# EAGLE board arduino_miniuno (EAGLE 6.6.0)

Size 203.18 x 263.83 mm. Coordinates in mm from the lower left corner, seen from the top.
Outline: 43.18,163.83 203.18,163.83 203.18,263.83 43.18,263.83 43.18,163.83
Copper layers (1*16): Top 0.035mm / dielectric 1.5mm / Bottom 0.035mm
Design rules "default": minimum track width 10mil, minimum drill 24mil, track to track 8mil, track to pad 8mil, pad to pad 8mil, via to via 8mil, smd to smd 8mil, copper to edge 40mil, drill to drill 8mil, minimum pad ring 10mil, minimum via ring 8mil, stop-mask expansion 4mil, vias tented up to drill 0mil, thermal gap 10mil
Net classes: 0 default: width 0.254 mm, clearance 0.254 mm; 1 power: width 0.61 mm, drill 0.61 mm, clearance 0.254 mm; 2 gnd: width 0.305 mm, drill 0.559 mm, clearance 0.254 mm; 3 usbvcc: width 0.508 mm, drill 0.61 mm, clearance 0.254 mm

## Footprints (pad centres in the part's own frame; a part is rotated, then mirrored left to right if it is on the bottom)
C0603-ROUND = smd 0.898 x 1.1: 1 -0.889,0; 2 0.889,0
C0402 = smd 0.635 x 0.635: 1 -0.445,0; 2 0.445,0
SOT23 = smd 1.016 x 1.143: 1 -0.889,-1.016; 2 0.889,-1.016; 3 0,1.016
SMB = smd 2.4 x 2.4: A 2.2,0; C -2.2,0
L1812 = smd 1.9 x 3.4: 1 -1.95,0; 2 1.95,0
7P-2.54-65/35MIL = drill 0.889 pad 1.651 square: 1 0,7.62 | drill 0.889 pad 1.651: 2 0,5.08; 3 0,2.54; 4 0,0; 5 0,-2.54; 6 0,-5.08; 7 0,-7.62
CHIP-LED0805 = smd 1.2 x 1.2: A 0,-1.05; C 0,1.05
0805 = smd 1.2 x 1: 1 -1.1,0; 2 1.1,0
PANASONIC_D = smd 3 x 1.4: + 2.4,0; - -2.4,0
ARDUINO_UNO = drill 1.016 pad 1.88: 0 63.5,50.8; 1 60.96,50.8; 2 58.42,50.8; 3 55.88,50.8; 3.3V 35.56,2.54; 4 53.34,50.8; 5 50.8,50.8; 5V 38.1,2.54; 6 48.26,50.8; 7 45.72,50.8; 8 41.656,50.8; 9 39.116,50.8; 10 36.576,50.8; 11 34.036,50.8; 12 31.496,50.8; 13 28.956,50.8; A0 50.8,2.54; A1 53.34,2.54; A2 55.88,2.54; A3 58.42,2.54; A4 60.96,2.54; A5 63.5,2.54; AREF 23.876,50.8; GND 26.416,50.8; GND. 43.18,2.54; GND.. 40.64,2.54; I/OREF 30.48,2.54; N/C 27.94,2.54; RESET 33.02,2.54; SCL 18.796,50.8; SDA 21.336,50.8; VIN 45.72,2.54 | drill 1.016 pad 1.88 octagon: +5V 66.167,30.48; GND_ 66.167,25.4; MISO 63.627,30.48; MOSI 66.167,27.94; RESET. 63.627,25.4; SCK 63.627,27.94 | smd 1.016 x 0.508: <PWR>+V 3.861,8.814; <PWR>-V 3.861,6.274 | smd 1.27 x 0.635: <USB>+V 7.772,39.878; <USB>D+ 7.772,38.887; <USB>D- 7.772,37.871; <USB>GND 7.772,36.83 | hole 3.2: 66.04,7.62; 66.04,35.56; 15.24,50.8; 13.97,2.54
LED-0603 = smd 0.762 x 0.889: + -0.762,0; - 0.762,0
R0402 = smd 0.635 x 0.635: 1 -0.445,0; 2 0.445,0
CAY16 = smd 0.5 x 0.65: 1 -1.2,-0.675; 2 -0.4,-0.675; 3 0.4,-0.675; 4 1.2,-0.675; 5 1.2,0.675; 6 0.4,0.675; 7 -0.4,0.675; 8 -1.2,0.675
SOT-23 = smd 0.787 x 0.889: 1 0.025,-1.016; 2 -0.94,1.016; 3 0.991,1.016
SSOP20 = smd 0.4 x 1.5: 1 -2.925,-3.625; 2 -2.275,-3.625; 3 -1.625,-3.625; 4 -0.975,-3.625; 5 -0.325,-3.625; 6 0.325,-3.625; 7 0.975,-3.625; 8 1.625,-3.625; 9 2.275,-3.625; 10 2.925,-3.625; 11 2.925,3.625; 12 2.275,3.625; 13 1.625,3.625; 14 0.975,3.625; 15 0.325,3.625; 16 -0.325,3.625; 17 -0.975,3.625; 18 -1.625,3.625; 19 -2.275,3.625; 20 -2.925,3.625
SOT223 = smd 1.219 x 2.235: 1 -2.311,-3.099; 2 0,-3.099; 3 2.311,-3.099 | smd 3.6 x 2.2: 4 0,3.099
SOT23-DBV = smd 0.55 x 1.2: 1 -0.95,-1.3; 2 0,-1.3; 3 0.95,-1.3; 4 0.95,1.3; 5 -0.95,1.3
MSOP08 = smd 0.3 x 1.2: 1 -0.976,-2.113; 2 -0.326,-2.113; 3 0.324,-2.113; 4 0.974,-2.113; 5 0.974,2.112; 6 0.324,2.112; 7 -0.326,2.112; 8 -0.976,2.112
PRO-MINI-2 = drill 0.8 long: A0 6.35,2.54; A1 6.35,0; A2 6.35,-2.54; A3 6.35,-5.08; A4 2.54,1.27; A5 2.54,3.81; A6 2.54,-8.89; A7 2.54,-6.35; D2 -8.89,2.54; D3 -8.89,0; D4 -8.89,-2.54; D5 -8.89,-5.08; D6 -8.89,-7.62; D7 -8.89,-10.16; D8 -8.89,-12.7; D9 -8.89,-15.24; D10 6.35,-15.24; D11 6.35,-12.7; D12 6.35,-10.16; D13 6.35,-7.62; DTR 5.08,15.24; GND 6.35,10.16; GND1 -8.89,5.08; GND2 -7.62,15.24; GND3 -5.08,15.24; RAW 6.35,12.7; RST 6.35,7.62; RST1 -8.89,7.62; RX1 -8.89,10.16; RX1-1 0,15.24; TX0 -8.89,12.7; TX0-1 2.54,15.24; VCC 6.35,5.08; VCC1 -2.54,15.24
HC49UP = smd 5.334 x 1.93: 1 -4.826,0; 2 4.826,0
PN61729 = drill 0.95 pad 1.676 octagon: 1 1.25,4.71; 2 -1.25,4.71; 3 -1.25,2.71; 4 1.25,2.71 | drill 2.2: P$1 -6,0; P$2 6,0
POWERSUPPLY_DC-21MM = drill 1.3 pad 4 octagon: 1 -5.08,-3.353; 2 -0.076,-6.35; 3 -0.076,-0.356 | drill 1.3: 4 -5.08,-4.115; 5 -5.08,-2.591; 6 -0.838,-0.356; 7 0.686,-0.356; 8 -0.838,-6.35; 9 0.686,-6.35
CT/CN0603 = smd 1 x 1: 1 -1,0; 2 1,0

## Placement (x,y rotation side)
C1  100n  [C0603-ROUND]  -5.08,76.2 0 top  (outside the outline)
C2  100n  [C0603-ROUND]  12.7,114.3 0 top
C3  1u  [C0603-ROUND]  0,76.2 0 top
C5  100nF  [C0402]  29.21,215.9 0 top
C6  22pF  [C0402]  25.4,215.9 0 top
C7  10nF  [C0402]  21.59,215.9 0 top
C8  22pF  [C0402]  17.78,215.9 0 top
D1  CESD5V0AP  [SOT23]  13.97,212.09 0 top
D2  CESD5V0AP  [SOT23]  5.08,212.09 0 top
D3  M7  [SMB]  15.24,123.19 0 top
F1  MF-MSMF050-2 500mA  [L1812]  11.43,200.66 0 top
J3  1X7P-2.54-2.54-6.0-90D-1  [7P-2.54-65/35MIL]  27.94,173.99 0 top
L  YELLOW  [CHIP-LED0805]  5.08,102.87 0 top
L1  BLM21  [0805]  22.86,212.09 0 top
PC1  47u  [PANASONIC_D]  -2.54,113.03 0 top
PC2  47u  [PANASONIC_D]  6.35,113.03 0 top
PCB2  ARDUINO_UNO  [ARDUINO_UNO]  0,0 0 top
PWR  GREEN  [LED-0603]  1.27,207.01 0 top
Q1  S8550  [SOT23]  0,212.09 0 top
Q2  S8550  [SOT23]  -5.08,212.09 0 top  (outside the outline)
R1  1k  [R0402]  13.97,215.9 0 top
R2  1k  [R0402]  10.16,215.9 0 top
R3  1k  [R0402]  6.35,215.9 0 top
R4  1k  [R0402]  2.54,215.9 0 top
R5  1k  [R0402]  -1.27,215.9 0 top
RN1  10K  [CAY16]  6.35,83.82 0 top
RN2  1K  [CAY16]  11.43,83.82 0 top
RX  RED  [LED-0603]  -2.54,207.01 0 top
T1  FDN340P  [SOT-23]  -3.81,81.28 0 top
TX  RED  [LED-0603]  27.94,212.09 0 top
U1  CH340T  [SSOP20]  1.27,170.18 0 top
U2  NCP1117ST50T3G  [SOT223]  -2.54,121.92 0 top
U3  LP2985-33DBVR  [SOT23-DBV]  -3.81,91.44 0 top
U5  LMV358IDGKR  [MSOP08]  -2.54,99.06 0 top
U$3  PRO-MINI-2  [PRO-MINI-2]  -36.83,16.51 0 top  (outside the outline)
X1  12MHz  [HC49UP]  5.08,191.77 0 top
X2  USB-B_TH  [PN61729]  16.51,175.26 0 top
X3  POWERSUPPLY_DC21MMX  [POWERSUPPLY_DC-21MM]  1.27,135.89 0 top
Z1  CG0603MLC-05E  [CT/CN0603]  19.05,207.01 0 top
Z2  CG0603MLC-05E  [CT/CN0603]  6.35,207.01 0 top

## Library data of the parts
C1-C3 U3 X2 X3 = SmartPrj
C5-C8 D1 D2 PWR Q1 Q2 R1-R5 RX TX X1 = Discrete
D3 = diode
F1 PC1 PC2 = rcl
J3 = Connector 
L = led
L1 = wuerth-elektronik
PCB2 = E14_Arduino_revB
RN1 RN2 = resistor-dil
T1 = zetex
U1 = template
U2 U5 = linear
U$3 = Arduino-clone
Z1 Z2 = varistor

## Nets
3.3V: PCB2.3.3V
5V: C5.2 D2.1 J3.4 PWR.+ Q1.2 Q2.2 U1.19
+3V3: C3.2 U3.5 U5.2
+5V [usbvcc]: C1.2 C2.2 PC2.+ T1.2 U2.2 U2.4 U3.1 U3.3 U5.8
A0: PCB2.A0 U$3.A0
A1: PCB2.A1 U$3.A1
A2: PCB2.A2 U$3.A2
A3: PCB2.A3 U$3.A3
A4: PCB2.A4
A5: PCB2.A5
CMP: RN1.1 RN1.2 U5.3
CTS: J3.5 U1.11
D2: PCB2.2 U$3.D2
D3: PCB2.3 U$3.D3
D4: PCB2.4 U$3.D4
D5: PCB2.5 U$3.D5
D6: PCB2.6 U$3.D6
D7: PCB2.7 U$3.D7
D8: PCB2.8 U$3.D8
D9: PCB2.9 U$3.D9
D10: PCB2.10 U$3.D10
D11: PCB2.11 U$3.D11
D12: PCB2.12 U$3.D12
D13: PCB2.13 U$3.D13
D+: U1.6 X2.3 Z1.1
D-: U1.7 X2.2 Z2.1
DTR: J3.1 U1.15 U$3.DTR
GATE_CMD: T1.3 U5.1
GND: C1.1 C2.1 C3.1 C5.1 C6.1 C7.2 C8.1 D1.3 D2.3 J3.6 L.C PC1.- PC2.- PCB2.GND PCB2.GND. PCB2.GND.. R3.1 R4.1 R5.1 RN1.7 U1.8 U2.1 U3.2 U5.4 U$3.GND U$3.GND1 U$3.GND2 U$3.GND3 X3.1 X3.3
L13: RN2.8 U5.6 U5.7
N$1: Q1.3 TX.+
N$2: Q2.3 RX.+
N$3: L.A RN2.1
N$4: C6.2 U1.9 X1.2
N$5: C8.2 U1.10 X1.1
N$6: R3.2 TX.-
N$7: Q1.1 R1.2
N$8: Q2.1 R2.2
N$10: R4.2 RX.-
N$12: PWR.- R5.2
N$41: PCB2.<USB>+V
N$42: PCB2.<USB>D+
N$43: PCB2.<USB>D-
N$44: PCB2.<USB>GND
N$45: PCB2.SCL
N$46: PCB2.SDA
N$47: PCB2.AREF
N$75: PCB2.I/OREF
N$76: PCB2.N/C
PWRIN [power]: D3.A X3.2
RST: PCB2.RESET U$3.RST U$3.RST1
RTS: J3.7 U1.16
RX: D1.2 J3.2 PCB2.0 R2.1 U1.4 U$3.RX1 U$3.RX1-1
SCK: U5.5
TX: D1.1 J3.3 PCB2.1 R1.1 U1.3 U$3.TX0 U$3.TX0-1
UGND [gnd]: L1.1 X2.4
USBVCC [usbvcc]: F1.1 T1.1
USHIELD [gnd]: L1.2 X2.P$1 X2.P$2 Z1.2 Z2.2
V3: C7.1 U1.5
VCC: PCB2.5V U$3.VCC U$3.VCC1
VIN [power]: D3.C PC1.+ PCB2.VIN RN1.8 U2.3 U$3.RAW
XUSB [usbvcc]: F1.2 X2.1

## Tracks (layer width: path | path; a pad name or v marks a point on that pad's centre or on a via)
5V  (6 unrouted)
+3V3  (2 unrouted)
+5V  (8 unrouted)
A0  (1 unrouted)
A1  (1 unrouted)
A2  (1 unrouted)
A3  (1 unrouted)
CMP  (2 unrouted)
CTS  (1 unrouted)
D2  (1 unrouted)
D3  (1 unrouted)
D4  (1 unrouted)
D5  (1 unrouted)
D6  (1 unrouted)
D7  (1 unrouted)
D8  (1 unrouted)
D9  (1 unrouted)
D10  (1 unrouted)
D11  (1 unrouted)
D12  (1 unrouted)
D13  (1 unrouted)
D+  (2 unrouted)
D-  (2 unrouted)
DTR  (2 unrouted)
GATE_CMD  (1 unrouted)
GND  (29 unrouted)
L13  (2 unrouted)
N$1  (1 unrouted)
N$2  (1 unrouted)
N$3  (1 unrouted)
N$4  (2 unrouted)
N$5  (2 unrouted)
N$6  (1 unrouted)
N$7  (1 unrouted)
N$8  (1 unrouted)
N$10  (1 unrouted)
N$12  (1 unrouted)
PWRIN  (1 unrouted)
RST  (2 unrouted)
RTS  (1 unrouted)
RX  (6 unrouted)
TX  (6 unrouted)
UGND  (1 unrouted)
USBVCC  (1 unrouted)
USHIELD  (4 unrouted)
V3  (1 unrouted)
VCC  (2 unrouted)
VIN  (5 unrouted)
XUSB  (1 unrouted)